# Altium PCB MP1584_rule.PcbDoc
Units mm, origin at the board's own origin, x right, y up, seen from the top; angles counter-clockwise.
Board outline 45.78 x 32.48 mm, 2 copper layers (Top Layer, Bottom Layer); 14 components, 10 nets, 35 pads, 22 vias.
Unrouted connection lines stored in the file: 21.
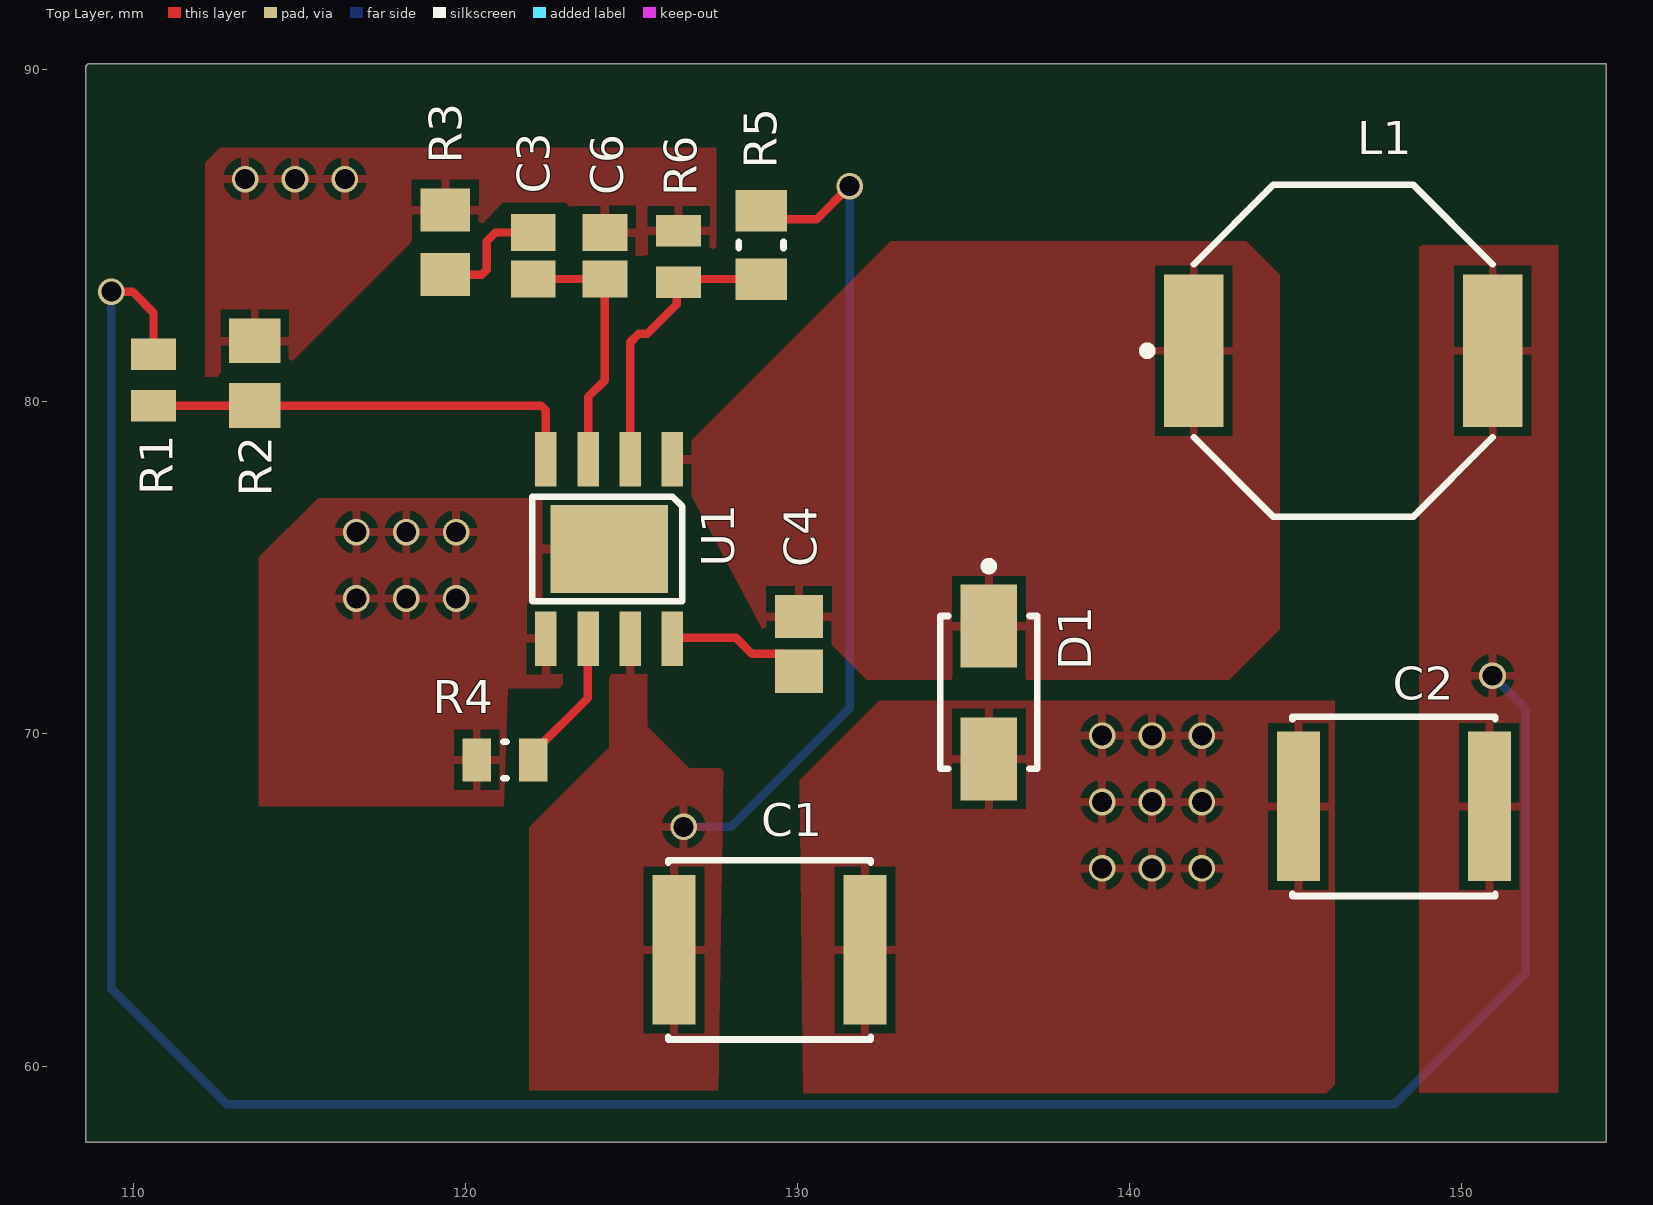
[diagram p0: Top Layer view]
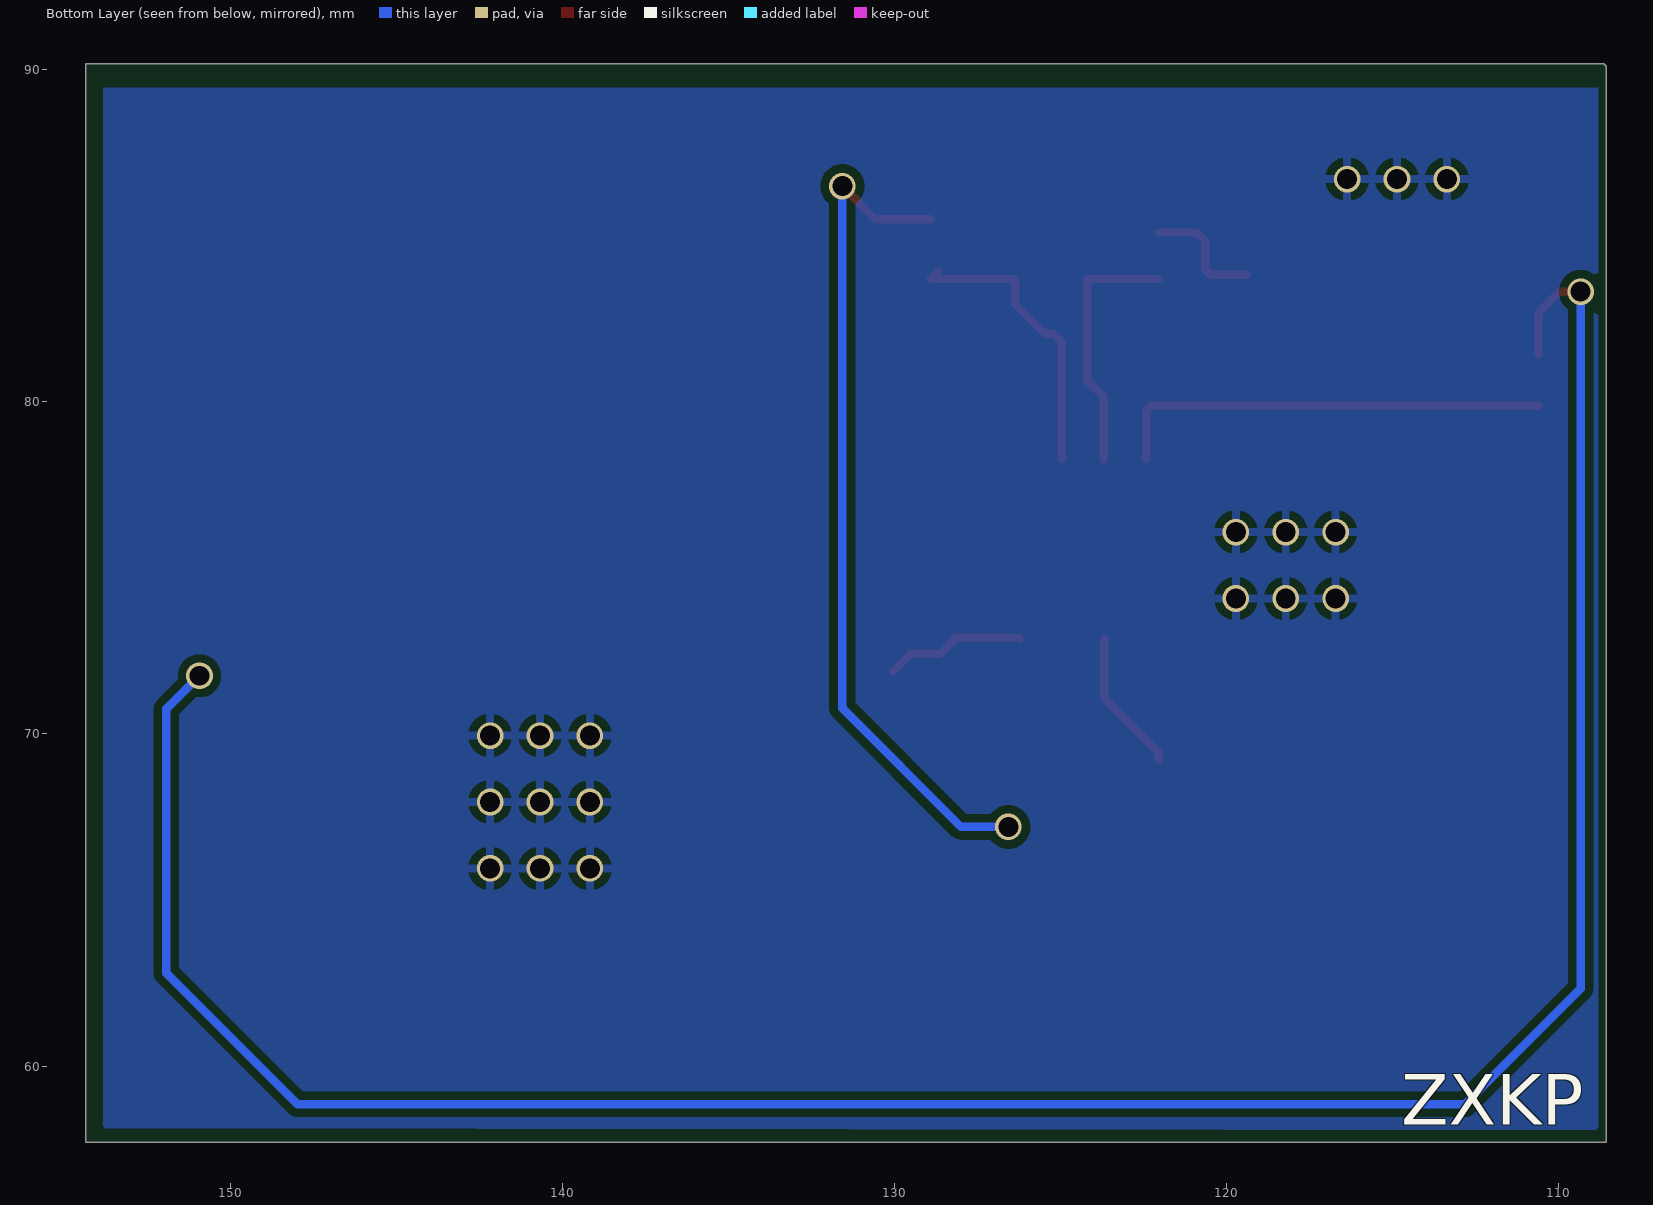
[diagram p1: Bottom Layer view, seen from below]

## Layer stack, top to bottom
Top Solder: solder mask 0.0102, Solder Resist, Dk 3.5
Top Layer: signal copper 0.0356
Dielectric 1: dielectric 0.32, FR-4, Dk 4.8
Bottom Layer: signal copper 0.0356
Bottom Solder: solder mask 0.0102, Solder Resist, Dk 3.5

## Board outline
108.575,57.7 154.35,57.7 154.35,90.175 108.65,90.175 108.575,90.1

## Design rules (kind name [scope] priority, off if disabled: settings)
Clearance Clearance_2 [All] p1: gap=0.2 ignorepadtopadclearanceinfootprint=FALSE
Clearance Clearance_1 [All] p2: gap=0.254 ignorepadtopadclearanceinfootprint=FALSE
Clearance [All] p3: gap=0.254 ignorepadtopadclearanceinfootprint=FALSE
PolygonConnect [All] p1: connectstyle=Relief reliefconductorwidth=0.254 reliefentries=4 polygonreliefangle="90 Angle" airgapwidth=0.254
RoutingVias [All] p1: holewidth=0.6 width=0.8 viastyle="Through Hole" minholewidth=0.6 minwidth=0.8 maxholewidth=0.6 maxwidth=0.8
SolderMaskExpansion [All] p1: expansion=0.102 istentingtop=FALSE
Width [All] p1: maxlimit=0.254 minlimit=0.254 preferedwidth=0.254
30 further rules are at their usual default settings.

## Components (designator, comment, footprint, x,y, rotation, side; value= is the part's Value field where it differs from the comment)
C1 "10uF" FP-C5750-230-0_4-MFG 129.159,63.5 r0 top
C2 "22uF" FP-C5750-230-0_4-MFG 147.955,67.818 r180 top
C3 "220pF" CAPC2013X88X50LL20T25 122.047,84.393 r270 top
C4 "100nF" CAPC2013X145X48NL20T23 130.048,72.708 r90 top
C6 "NO" CAPC2013X88X50LL20T25 124.206,84.393 r270 top
D1 "B340A-13-F" FP-SMA-MFG 135.763,71.247 r270 top
L1 "744066100" WE-TPC_1038 146.431,81.534 r90 top
R1 "124k" RESC2013X70X40LL20T20 110.617,80.658 r90 top
R2 "40.2k" RESC2013X70X40ML20T20 113.665,80.858 r270 top
R3 "68.1k" RESC2013X55X40ML15T20 119.4,84.8 r270 top
R4 "200k" RESC0805(2012)_L 121.197,69.215 r0 top value="200000.00 Ohm"
R5 "100k" RESC2013X50X30ML20T20 128.905,84.718 r90 top
R6 "24.9k" RESC2013X70X40LL20T20 126.425,84.375 r270 top
U1 "Component_1" PCBComponent_1 124.333,75.565 r180 top

## Footprints (in the part's own frame and the unit in brackets; to place one, negate y for a bottom-side part, rotate by r counter-clockwise, add the part's x,y. Pads: shape width x height; smd on the part's side, far side on the other; paste and mask are expansions set on the pad)
CAPC2013X88X50LL20T25 [mm] "Chip Capacitor, 2-Leads, Body 2.00x1.25mm, IPC High Density"
  rect 1.1x1.35 smd: 1(-0.7,0) 2(0.7,0)
  body extent -1.1,-0.72 1.1,0.72, height 0.88
CAPC2013X145X48NL20T23 [mm] "Chip Capacitor, 2-Leads, Body 2.00x1.25mm, IPC Medium Density"
  rect 1.3x1.45 smd: 1(-0.825,0) 2(0.825,0)
  body extent -1.1,-0.72 1.1,0.72, height 1.45
FP-C5750-230-0_4-MFG [mm]
  rect 1.3x4.5 smd paste+0 mask+0: 1(-2.875,0) 2(2.875,0)
  silkscreen extent -3.05,-2.7 3.05,2.7, body extent -3.62,-2.8 3.62,2.8, height 0.25
FP-SMA-MFG [mm]
  rect 2.5x1.7 smd paste+0 mask+0: 1(-2,0) 2(2,0)
  silkscreen extent -3.92,-1.46 2.3,1.46, body extent -3.35,-1.56 3.35,1.56, height 0.25
PCBComponent_1 [mm]
  rect 0.65x1.64 smd: 1(-1.905,-2.7) 2(-0.635,-2.7) 3(0.635,-2.7) 4(1.905,-2.7) 5(1.905,2.7) 6(0.635,2.7) 7(-0.635,2.7) 8(-1.905,2.7)
  rect 3.54x2.64 smd: 5(-0.005,0)
  silkscreen extent -2.2,-1.58 2.32,1.58
RESC0805(2012)_L [mm] "Chip Resistor, Body 2.0x1.3mm, IPC High Density"
  rect 0.85x1.3 smd: 1(-0.85,0) 2(0.85,0)
  silkscreen extent -0.05,-0.55 0.05,0.55, body extent -1.1,-0.67 1.1,0.68, height 0.7
RESC2013X50X30ML20T20 [mm] "Chip Resistor, 2-Leads, Body 2.00x1.25mm, IPC Low Density"
  rect 1.25x1.55 smd: 1(-1.025,0) 2(1.025,0)
  silkscreen extent -0.1,-0.67 0.1,0.67, body extent -1.1,-0.72 1.1,0.72, height 0.5
RESC2013X55X40ML15T20 [mm] "Chip Resistor, 2-Leads, Body 2.00x1.25mm, IPC Low Density"
  rect 1.3x1.5 smd: 1(-0.975,0) 2(0.975,0)
  body extent -1.07,-0.7 1.08,0.7, height 0.55
RESC2013X70X40LL20T20 [mm] "Chip Resistor, 2-Leads, Body 2.00x1.25mm, IPC High Density"
  rect 0.95x1.35 smd: 1(-0.775,0) 2(0.775,0)
  body extent -1.1,-0.72 1.1,0.72, height 0.7
RESC2013X70X40ML20T20 [mm] "Chip Resistor, 2-Leads, Body 2.00x1.25mm, IPC Low Density"
  rect 1.35x1.55 smd: 1(-0.975,0) 2(0.975,0)
  body extent -1.1,-0.72 1.1,0.72, height 0.7
WE-TPC_1038 [mm] "Power Inductor, SMD, 2-Leads, body 10x10mm"
  rect 4.6x1.8 smd: 1(0,4.5) 2(0,-4.5)
  silkscreen extent -5,-4.5 5,6.02, body extent -5,-5 5,5, height 3.8

## Part data
C1 C2: library part CMP-08246-002717-1, "Multilayer Ceramic Capacitors 10uF ±10% 50V X5R SMD 2220", Case Code (Imperial)=2220, Case Code (Metric)=5750, Dielectric=X5R, Dielectric Material=Ceramic, Max Operating Temperature=85°C, Min Operating Temperature=-55°C, Package Quantity=1, Tolerance=10%, Voltage=50V, Case/Package=2220, Construction=Flat, Depth=5mm, Height=2.3mm, Lead Free="Lead Free", Length=5.7mm, Mount="Surface Mount", Number of Pins=2, Packaging="Tape and Reel", Radiation Hardening=No, REACH SVHC="No SVHC", Resistor Type=Ceramic, RoHS Compliant=Yes, Series=C, Termination=SMD/SMT, Thickness=0.098inch, Voltage Rating=50V, Voltage Rating (DC)=50V, Weight=0.016932oz, Width=0.197inch
  C1: Capacitance=10uF
  C2: Capacitance=22uF
C3 C6: library part CMP-2007-00574-1, Manufacturer=Kemet, Part Number=C0805X221J1GACTU
C4: library part CMP-2007-03172-1, Manufacturer=Vitramon, Part Number=VJ0805Y104KXXAT
D1: library part CMP-1667-00003-3, "DIODE SCHOTTKY 40V 3A SMA", Average Rectified Current=3A, Capacitance=250pF, Case/Package=SMA, Forward Voltage=500mV, Max Forward Surge Current (Ifsm)=80A, Max Operating Temperature=125°C, Max Repetitive Reverse Voltage (Vrrm)=40V, Max Reverse Current=500uA, Min Operating Temperature=-55°C, Package Quantity=5000, Contact Plating=Tin, Current=3A, Current Rating=3A, Element Configuration=Single, Forward Current=3A, Height=2.3mm, Lead Free="Lead Free", Length=4.6mm, Max Reverse Voltage (DC)=40V, Mount="Surface Mount", Number of Pins=2, Output Current=3A, Packaging="Tape and Reel", Peak Non-Repetitive Surge Current=80A, Polarity=Standard, Radiation Hardening=No, REACH SVHC="No SVHC", RoHS Compliant=Yes, Series=-, Termination=SMD/SMT, Voltage=40V, Voltage Rating (DC)=40V, Weight=0.002258oz, Width=2.92mm
L1: library part CMP-0227-00093-3, Ambient Temperature Range High=95°C, Ambient Temperature Range Low=-40°C, Case/Package=Nonstandard, Current Rating=3.6A, DC Resistance (DCR)=25mΩ, Inductance=10µH, Inductance Tolerance=30%, Max Operating Temperature=125°C, Resistance=28mΩ, Saturation Current=4A, Self Resonant Frequency=20MHz, Series Resistance=35mΩ, Test Frequency=100kHz, Composition=Wirewound, Core Material=Ferrite, Depth=10mm, Height=3.8mm, Height - Seated (Max)=4.0894mm, Length=10mm, Max DC Current=3.6A, Min Operating Temperature=-40°C, Mount="Surface Mount", NexarPartId=22803276, Number of Pins=2, Packaging="Cut Tape (CT)", REACH SVHC=Unknown, RMS Current (Irms)=3.6A, RoHS=Compliant, Shielding=Shielded, Termination=SMD/SMT, Tolerance=30%, Weight=1.273007g, Width=10mm
R1: library part CMP-2001-00345-1, Manufacturer=Panasonic, Part Number=ERJ-6GEYJ121V
R2: library part CMP-2001-00551-1, Manufacturer=Panasonic, Part Number=ERJ6ENF4702V
R3: library part CMP-2001-04746-1, Manufacturer="Vishay Dale", Part Number=TNPW080520K0BEEA
R4: library part CMP-1013-00129-1, "200K 0.125W 5% 0805 (2012 Metric)  SMD", Case-EIA=0805, Case-Metric=2012, Power="0.125 W", Tolerance="5 %", Technology=SMT
R5: library part CMP-2001-04900-1, Manufacturer="Vishay Dale", Part Number=CRCW0805100KJNEA
R6: library part CMP-2001-00073-1, Manufacturer=Panasonic, Part Number=ERJ-6ENF2492V
U1: library part MP1584

## Via types
v1: diameter 0.8, hole 0.6, Top Layer to Bottom Layer, 22 vias

## Nets (pads, with @x,y where several pads share a name; then routed paths per layer and width w, separated by ;. In a path a pad name is that pad's centre, name@x,y a point inside that pad or via, vN(x,y) a via of type N, cw(c..) or ccw(c..) an arc to the next point about the centre after c; other vN are vias at no path point)
GND: C1.2 C2.2 C6.1 D1.2 R2.1 R3.1 R4.1 R6.1 U1.5
  other v1: 139.175,65.95 140.675,65.95 142.175,65.95 139.175,67.95 140.675,67.95 142.175,67.95 139.175,69.95 140.675,69.95 142.175,69.95 116.725,74.075 118.225,74.075 119.725,74.075 116.725,76.075 118.225,76.075 119.725,76.075 113.375,86.7 114.875,86.7 116.375,86.7
NetC1_1: C1.1 R5.2 U1.7 | length 25.3
  Top Layer w0.254: R5.2@128.905,85.489 130.574,85.489 v1(131.572,86.487)
  Bottom Layer w0.254: v1(126.575,67.2) 128,67.2 131.572,70.772 v1(131.572,86.487)
NetC2_1: C2.1 L1.2 R1.2 | length 78.8
  Top Layer w0.254: v1(109.347,83.312) 109.982,83.312 110.617,82.677 R1.2
  Bottom Layer w0.254: v1(109.347,83.312) 109.347,62.328 112.825,58.85 147.975,58.85 151.925,62.8 151.925,70.75 v1(150.925,71.75)
NetC3_1: C3.1 R3.2 | length 3.7
  Top Layer w0.254: R3.2 120.501,83.825 120.65,83.974 120.65,84.836 120.907,85.093 C3.1
NetC3_2: C3.2 C6.2 U1.3 | length 7.8
  Top Layer w0.254: C3.2 C6.2 124.206,80.645 123.698,80.137 U1.3
NetC4_1: C4.1 U1.8 | length 4.2
  Top Layer w0.254: U1.8@126.233,72.865 126.266,72.898 128.143,72.898 128.635,72.406 129.525,72.406 C4.1
NetC4_2: C4.2 D1.1 L1.1 U1.1
NetR1_1: R1.1 R2.2 U1.4 | length 13.3
  Top Layer w0.254: R1.1 R2.2 122.279,79.883 122.428,79.734 U1.4
NetR4_2: R4.2 U1.6 | length 4.3
  Top Layer w0.254: R4.2 122.047,69.44 123.693,71.086 U1.6@123.693,72.865
NetR5_1: R5.1 R6.2 U1.2 | length 9
  Top Layer w0.254: U1.2 124.968,81.788 125.222,82.042 125.476,82.042 126.365,82.931 126.365,83.667 126.391,83.693 R5.1 R5.1@128.677,83.921

## Polygon pours and split planes (outlines as drawn)
NetC2_1 on Top Layer "NETC2_1_L01_P000" (solid, pour order 0): 148.717,59.2 152.908,59.2 152.908,84.709 148.844,84.709 148.717,84.836
GND on Top Layer "GND_L01_P019" (solid, pour order 19): 123.175,84.4 127.3,84.4 127.55,84.65 127.55,87.65 112.625,87.65 112.175,87.2 112.175,80.75 114.325,80.75 118.4,84.825 120.4,84.825 120.4,85.25 121.15,86 123.025,86 123.225,85.8 123.225,84.425
GND on Top Layer "GND_L01_P011" (solid, pour order 11): 121.158,67.818 113.792,67.818 113.792,75.311 115.57,77.089 126.619,77.089 126.619,74.168 123.317,74.168 122.936,73.914 122.936,72.644 122.936,71.501 122.809,71.374 121.285,71.374
NetC1_1 on Top Layer "NETC1_1_L01_P014" (solid, pour order 14): 127.624,59.275 121.92,59.275 121.92,67.183 124.333,69.596 124.333,73.914 124.46,73.914 124.587,74.041 124.714,73.914 125.476,73.914 125.476,70.231 126.746,68.961 127.762,68.961
GND on Top Layer "GND_L01_P001" (solid, pour order 1): 130.073,68.605 132.461,70.993 146.177,70.993 146.177,59.436 145.923,59.182 130.175,59.182
NetC4_2 on Top Layer "NETC4_2_L01_P009" (solid, pour order 9): 126.233,78.265 132.804,84.836 143.51,84.836 144.526,83.82 144.526,73.152 143.002,71.628 132.08,71.628 130.937,72.771 129.159,72.771
GND on Bottom Layer "GND_L02_P020" (solid, pour order 20): 153.95,58.125 153.825,58.25 153.825,89.45 108.825,89.45 108.825,58.075

## Silkscreen, mask and mechanical layers (free items; w line width, h text height)
Bottom Overlay:
  text "ZXKP" at 114.746,58.229 h1.52
Mechanical 1:
  the board outline again, w0.2